# Altium PCB NFC_antenna.PcbDoc
Units mm, origin at the board's own origin, x right, y up, seen from the top; angles counter-clockwise.
Board outline 37.28 x 31.82 mm, 2 copper layers (Top Layer, Bottom Layer), stack 1.671 mm thick; 4 components, 7 nets, 21 pads, 2 vias.
Unrouted connection lines stored in the file: 13.
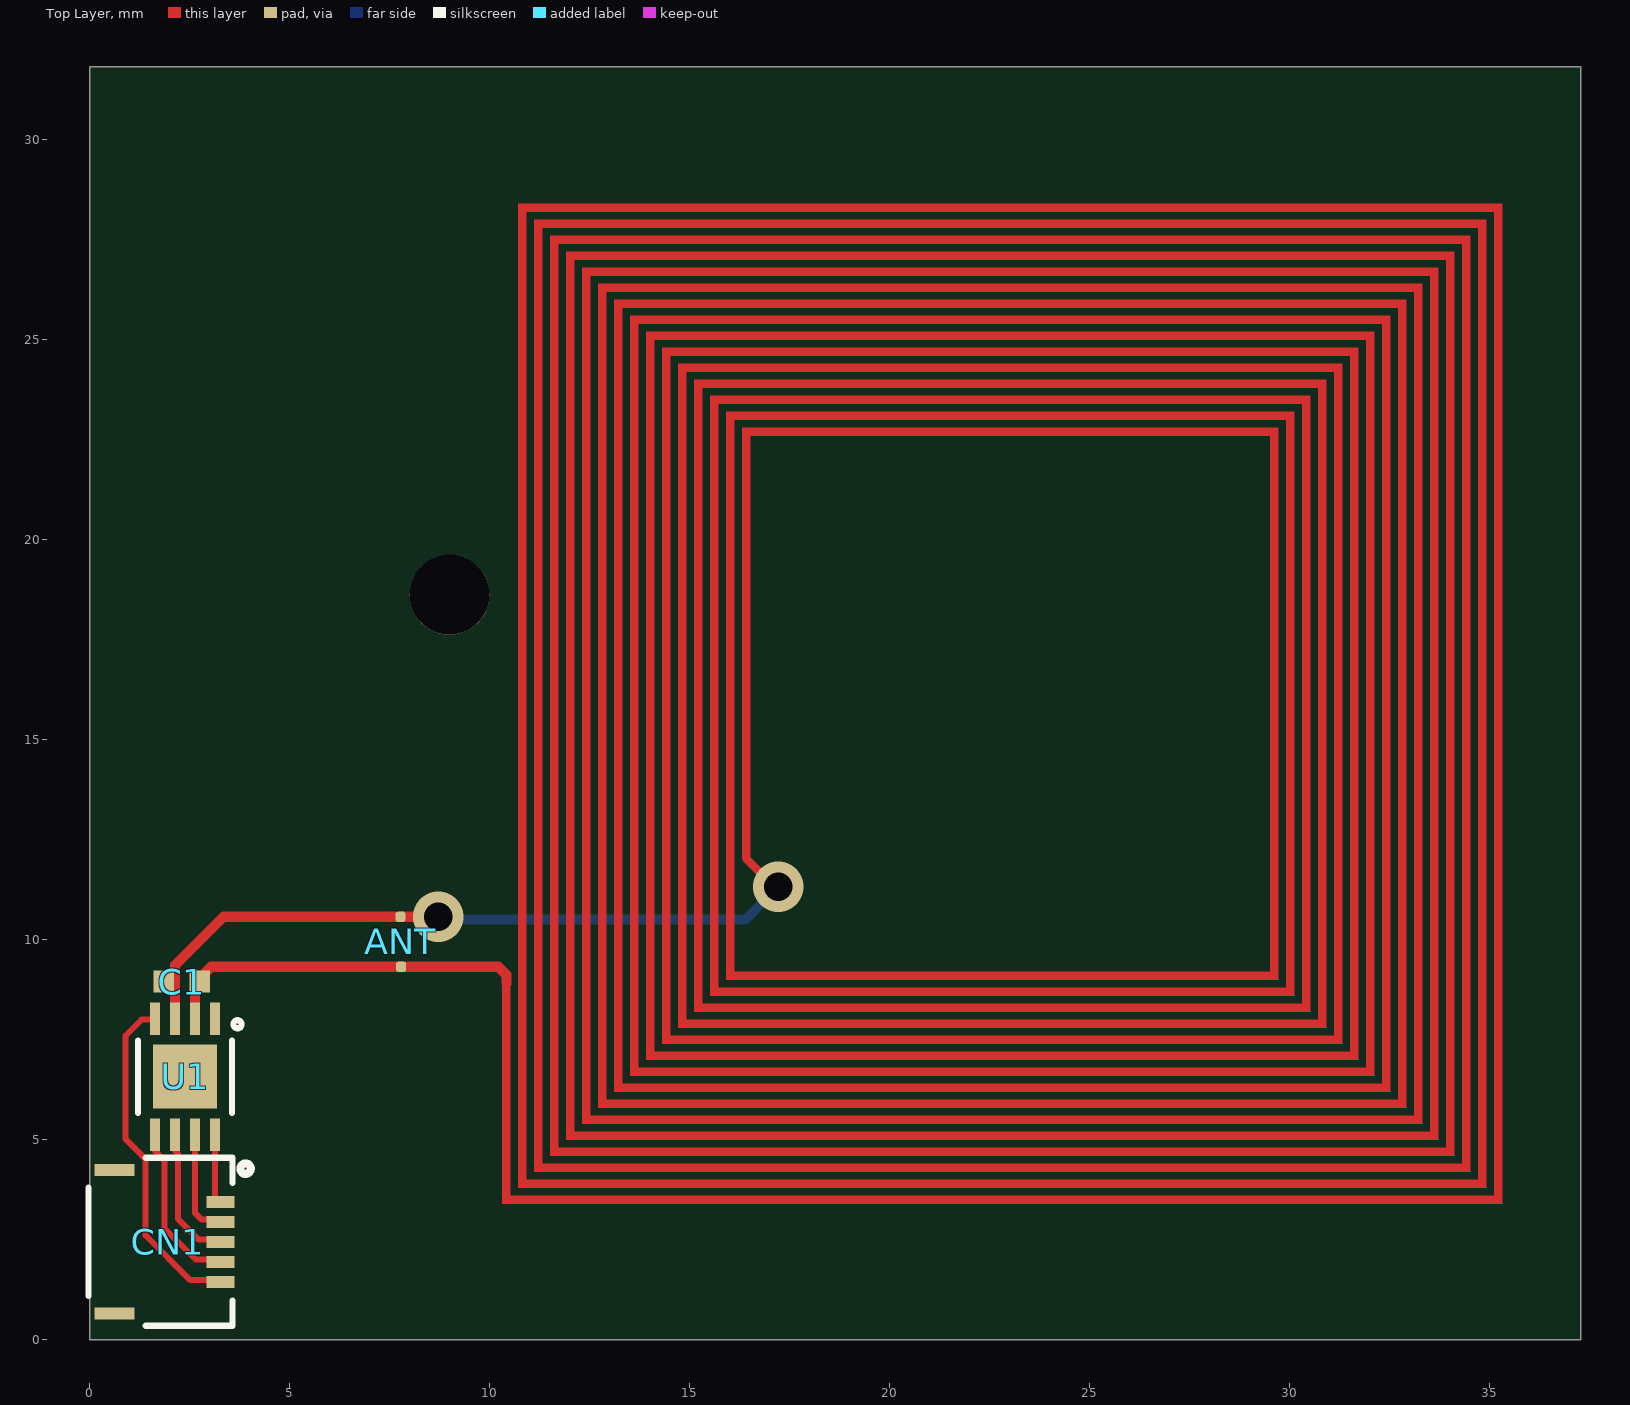
[diagram p0: Top Layer view]
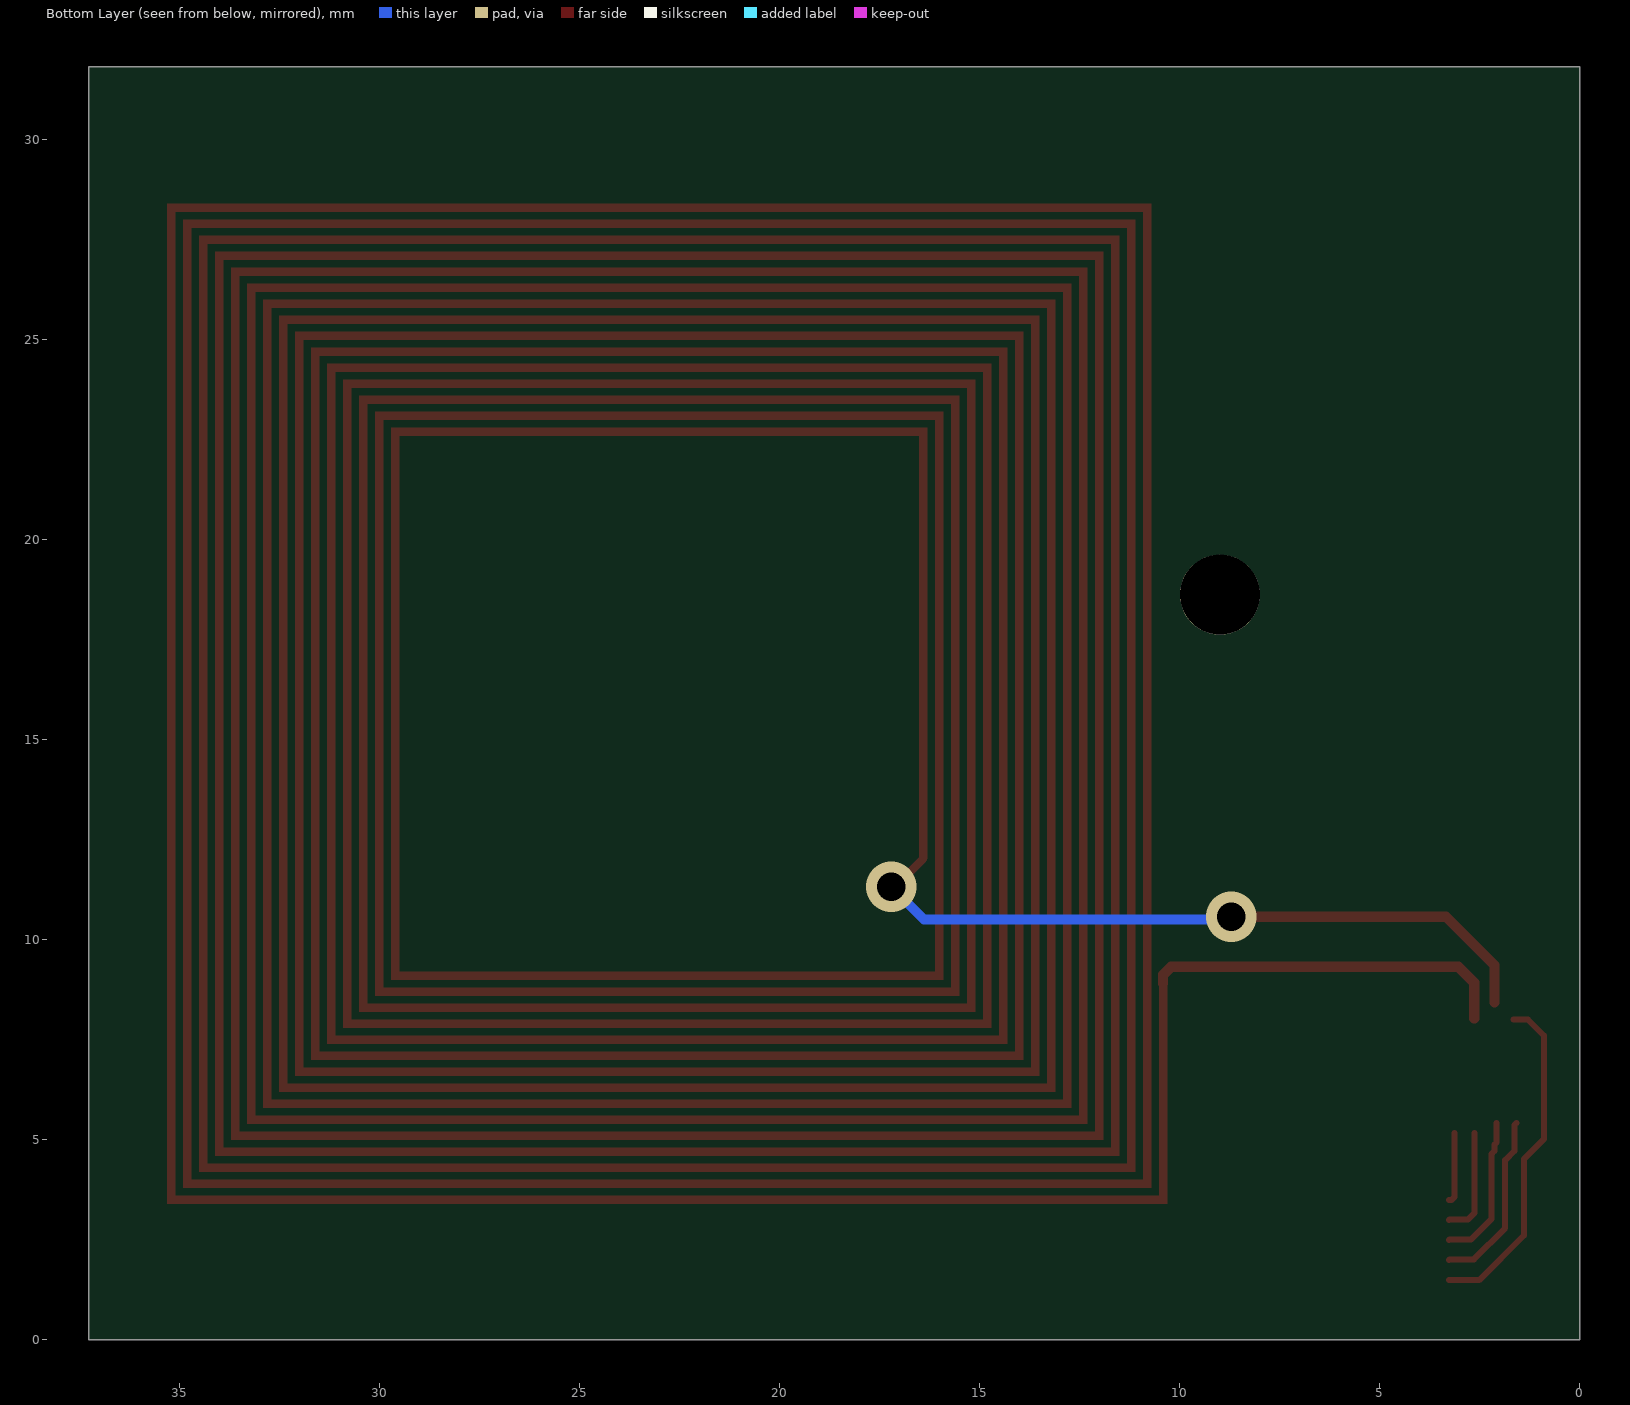
[diagram p1: Bottom Layer view, seen from below]
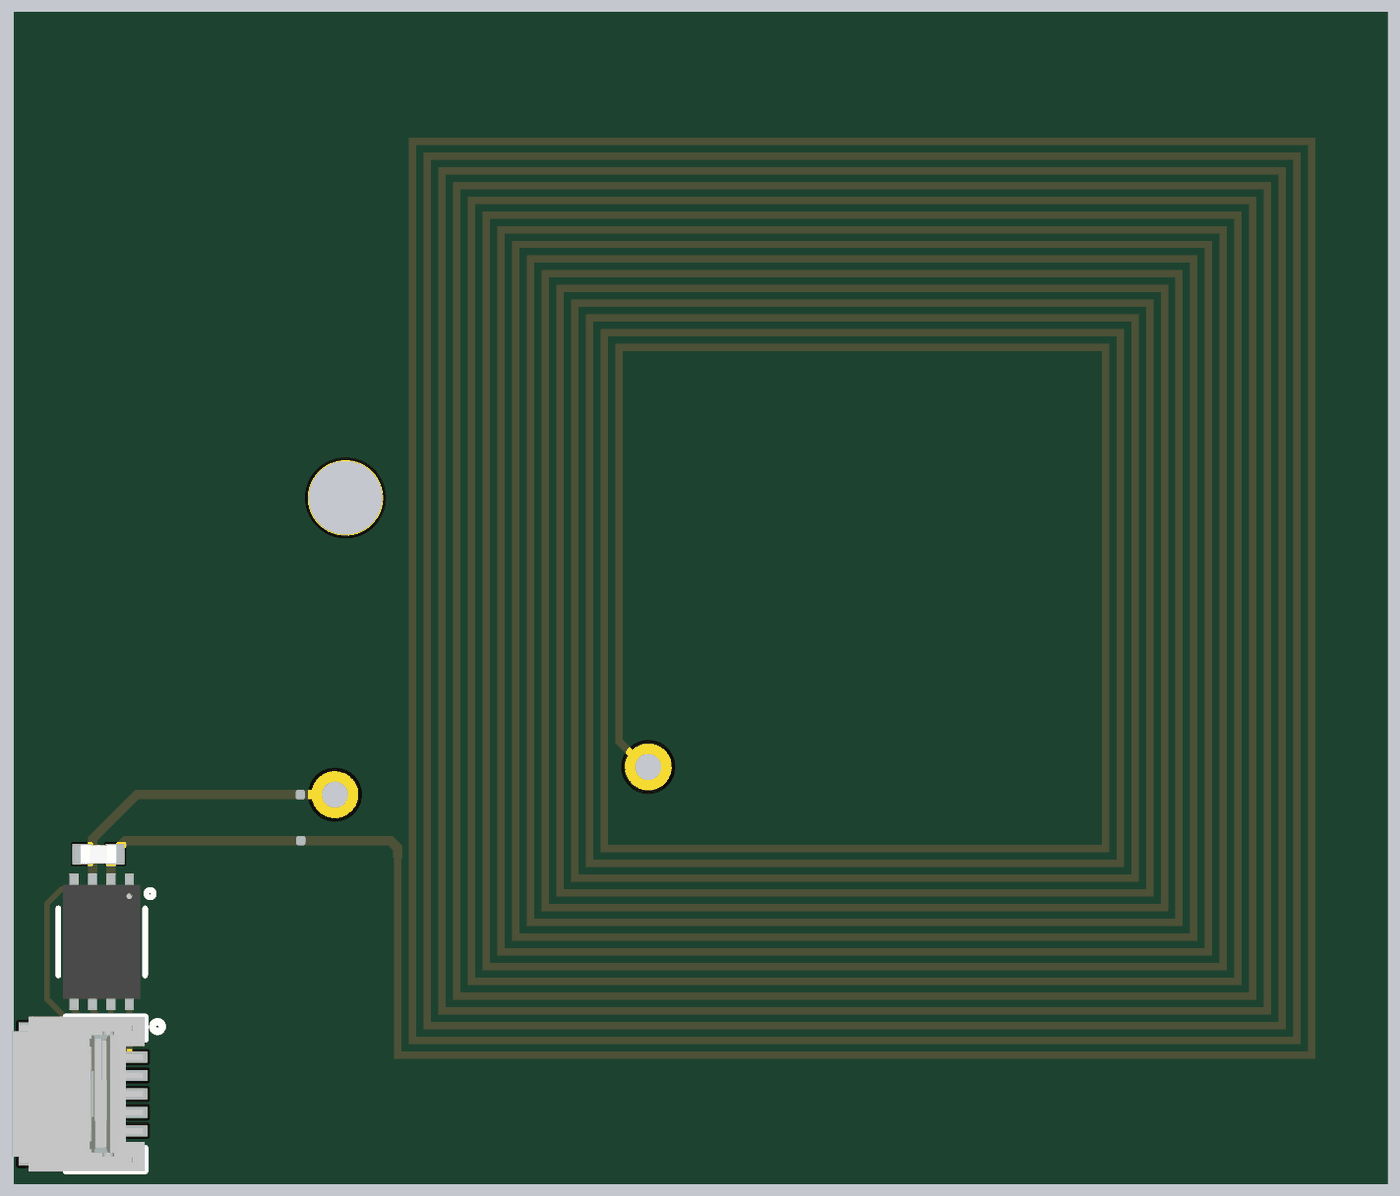
[diagram p2: 3D render of the assembled board from above, using the file's embedded part models]

## Layer stack, top to bottom
Top Solder: solder mask 0.0102, Solder Resist, Dk 3.5
Top Layer: signal copper 0.0356
Dielectric 1: dielectric 1.6, FR-4, Dk 4.5
Bottom Layer: signal copper 0.0356
Bottom Solder: solder mask 0.0102, Solder Resist, Dk 3.5

## Board outline
0,0 37.28,0 37.28,31.82 0,31.82

## Design rules (kind name [scope] priority, off if disabled: settings)
Clearance [All] p1: gap=0.15 ignorepadtopadclearanceinfootprint=FALSE
PolygonConnect [All] p1: connectstyle=Relief reliefconductorwidth=0.254 reliefentries=4 polygonreliefangle="90 Angle" airgapwidth=0.254
RoutingVias [All] p1: holewidth=0.711 width=1.27 viastyle="Through Hole" minholewidth=0.711 minwidth=1.27 maxholewidth=0.711 maxwidth=1.27
SolderMaskExpansion [All] p1: expansion=0.102 istentingtop=FALSE
Width [All] p1: maxlimit=0.3 minlimit=0.15 preferedwidth=0.15
30 further rules are at their usual default settings.

## Components (designator, comment, footprint, x,y, rotation, side; value= is the part's Value field where it differs from the comment)
ANT "ST25D_ANT" ESL_NFC_ANT 7.776,10.567 r0 top
C1 "Capacitor" C0402 2.3,8.95 r0 top
CN1 "5034800540" CON_5034800540_MOL 1.778,2.443 r270 top
U1 "ST25DV04K-IER6C3" UFDFPN8_STM 2.387,6.57 r270 top

## Footprints (in the part's own frame and the unit in brackets; to place one, negate y for a bottom-side part, rotate by r counter-clockwise, add the part's x,y. Pads: shape width x height; smd on the part's side, far side on the other; paste and mask are expansions set on the pad)
C0402 [mm]
  rect 0.51x0.56 smd mask+0.05: 1(-0.45,0) 2(0.45,0)
  body extent -0.5,-0.3 0.5,0.3, height 0.4
CON_5034800540_MOL [mm]
  rect 0.3x0.7 smd paste+0 mask+0.076: 1(-1,1.5) 2(-0.5,1.5) 3(0,1.5) 4(0.5,1.5) 5(1,1.5)
  rect 0.3x1 smd paste+0 mask+0.076: P1(-1.79,-1.15) P2(1.79,-1.15)
  silkscreen extent -2.1,-1.8 2.1,2.25, body extent -2.1,-1.82 2.1,1.78, height 1.87
ESL_NFC_ANT [mil]
  rrect50% 10x10 smd mask+4: 1(0,0) 2(0.51,-49.21)
  Top Layer region: 1084.43,-282.16 100.18,-282.16 100.17,-66.29 100.27,-66.36 104.11,-67.12 107.95,-66.36 108.05,-66.29 108.05,-274.28 1076.55,-274.28 1076.55,694.22 123.8,694.22 123.8,-258.54 1060.81,-258.54 1060.81,678.47 139.55,678.47 139.55,-242.79 1045.06,-242.79 1045.06,662.72 155.29,662.72 155.29,-227.04 1029.31,-227.04 1029.31,646.98 171.04,646.98 171.04,-211.29 1013.56,-211.29 1013.56,631.23 186.79,631.23 186.79,-195.54 997.81,-195.54 997.81,615.48 202.54,615.48 202.54,-179.8 982.07,-179.8 982.07,599.73 218.29,599.73 218.29,-164.05 966.32,-164.05 966.32,583.98 234.03,583.98 234.03,-148.3 950.57,-148.3 950.57,568.24 249.78,568.24 249.78,-132.55 934.82,-132.55 934.82,552.49 265.53,552.49 265.53,-116.8 919.07,-116.8 919.07,536.74 281.28,536.74 281.28,-101.06 903.33,-101.06 903.33,520.99 297.03,520.99 297.03,-85.31 887.58,-85.31 887.58,505.24 312.77,505.24 312.77,-69.56 871.83,-69.56 871.83,489.5 328.52,489.5 328.52,-53.81 856.08,-53.81 856.08,473.75 344.27,473.75 344.27,57 336.4,57 336.4,481.62 863.96,481.62 863.96,-61.69 320.65,-61.69 320.65,497.37 879.7,497.37 879.7,-77.43 304.9,-77.43 304.9,513.12 895.45,513.12 895.45,-93.18 289.15,-93.18 289.15,528.87 911.2,528.87 911.2,-108.93 273.4,-108.93 273.4,544.61 926.95,544.61 926.95,-124.68 257.66,-124.68 257.66,560.36 942.7,560.36 942.7,-140.43 241.91,-140.43 241.91,576.11 958.44,576.11 958.44,-156.17 226.16,-156.17 226.16,591.86 974.19,591.86 974.19,-171.92 210.41,-171.92 210.41,607.61 989.94,607.61 989.94,-187.67 194.66,-187.67 194.66,623.35 1005.69,623.35 1005.69,-203.42 178.92,-203.42 178.92,639.1 1021.44,639.1 1021.44,-219.17 163.17,-219.17 163.17,654.85 1037.18,654.85 1037.18,-234.91 147.42,-234.91 147.42,670.6 1052.93,670.6 1052.93,-250.66 131.67,-250.66 131.67,686.35 1068.68,686.35 1068.68,-266.41 115.92,-266.41 115.92,702.09 1084.43,702.09
  Top Layer lines w7.87: 340.33,57 367.8,29.53
  Top Layer lines w10: 0,0 36.99,0 ; 0.51,-49.21 96.23,-49.21 104.11,-57.09 104.11,-65.43
  Bottom Layer lines w10: 39.62,-2.63 339.48,-2.63 371.64,29.53
UFDFPN8_STM [mil]
  rect 31.7x9.8 smd paste+0 mask+0: 1(-57.15,29.55) 2(-57.15,9.85) 3(-57.15,-9.85) 4(-57.15,-29.55) 5(57.15,-29.55) 6(57.15,-9.85) 7(57.15,9.85) 8(57.15,29.55)
  rect 63x63 smd paste+0 mask+0: 9(0,0)
  silkscreen extent -56,-46 36,56, body extent -61,-41 61,41, height 24

## Part data
C1: library part MCD-00003, "Multilayer Ceramic Capacitor, 1.5 pF, 50 V, ± 0.1pF, C0G (NP0), 0402 [1005 Metric]", Manufacturer=Murata, Manufacturer Part Number=GJM1555C1H1R5BB01D, Supplier Part Number 1=490-8087-1-ND, Category="Ceramic Capacitors", ComponentLink1URL=http://tunmcdsvn.tun.st.com/Component_Documentation_Library/Trunk/Capacitor/YAGEO_NP0_Series, ComponentLink2Description=https://datasheet.ciiva.com/8030/1700191-8030107.pdf?src-supplier=Element14, ComponentLink2URL=https://datasheet.ciiva.com/8030/1700191-8030107.pdf?src-supplier=Element14, ComponentLink3Description=https://datasheet.ciiva.com/29542/partnumbering-e-01-29542725.pdf?src-supplier=Digikey, ComponentLink3URL=https://datasheet.ciiva.com/29542/partnumbering-e-01-29542725.pdf?src-supplier=Digikey, ComponentLink4Description=https://datasheet.ciiva.com/29542/partnumbering-e-01-29542726.pdf?src-supplier=Digikey, ComponentLink4URL=https://datasheet.ciiva.com/29542/partnumbering-e-01-29542726.pdf?src-supplier=Digikey, Material=4241ConductorMaterial, Pricing 1="1=0.17, 10=0.112, 50=0.067, 100=0.0527, 500=0.03896, 1000=0.03225, 2500=0.03002, 5000=0.02746 (USD)", RoHS=Yes, Stock 1=133157, Supplier 1=Digikey
CN1: library part 5034800540_5_circuits, "No Description Available", Mfr_Name="Molex Connector Corporation", Copyright="Copyright (C) 2023 Ultra Librarian. All rights reserved.", Manufacturer_Part_Number=5034800540, RefDes=RefDes, Type=DEV
U1: "No Description Available", Mfr_Name=STMicroelectronics, Copyright="Copyright (C) 2023 Ultra Librarian. All rights reserved.", Manufacturer_Part_Number=ST25DV04K-IER6C3, RefDes=RefDes, Type=DEV

## Free pads (board coordinates)
  round 2 hole 2: 13(9,18.62)

## Via types
v1: diameter 1.27/1.27 (per signal layer), hole 0.711, Top Layer to Bottom Layer, 2 vias

## Nets (pads, with @x,y where several pads share a name; then routed paths per layer and width w, separated by ;. In a path a pad name is that pad's centre, name@x,y a point inside that pad or via, vN(x,y) a via of type N, cw(c..) or ccw(c..) an arc to the next point about the centre after c; other vN are vias at no path point)
AC0: ANT.2 C1.2 U1.2 | length 9.1
  Top Layer w0.254: U1.2 2.639,8.024 2.639,8.917 3.039,9.317 10.22,9.317 10.42,9.117 10.42,8.905
AC1: ANT.1 C1.1 U1.3 | length 10.3
  Top Layer w0.2: 16.42,12.015 17.118,11.317 v1(17.215,11.317)
  Top Layer w0.254: 2.137,8.424 2.137,9.357 3.347,10.567 v1(8.715,10.567)
  Bottom Layer w0.2: v1(8.715,10.567) v1@8.782,10.5
  Bottom Layer w0.254: 16.398,10.5 v1(17.215,11.317)
GND: CN1.5 U1.4 | length 8.5
  Top Layer w0.15: U1.4@1.657,8.001 1.301,8.001 0.9,7.6 0.9,5.009 1.4,4.509 1.4,2.6 2.517,1.483 CN1.5@3.278,1.483
GPO: CN1.2 U1.7 | length 2.7
  Top Layer w0.15: U1.7@2.637,5.168 2.637,3.159 2.792,3.004 3.257,3.004 CN1.2@3.278,2.983
SCL: CN1.3 U1.6 | length 3.7
  Top Layer w0.15: U1.6@2.087,5.414 2.087,4.922 2.136,4.873 2.136,4.716 2.216,4.636 2.216,3.008 2.72,2.504 3.257,2.504 CN1.3@3.278,2.483
SDA: CN1.4 U1.5 | length 4.5
  Top Layer w0.15: U1.5@1.589,5.412 1.636,5.365 1.636,4.716 1.87,4.482 1.87,2.783 2.649,2.004 3.257,2.004 CN1.4@3.278,1.983
VDD: CN1.1 U1.8 | length 1.8
  Top Layer w0.15: U1.8@3.137,5.168 3.137,3.558 3.212,3.483 CN1.1@3.278,3.483
pads on no net: CN1.P1 CN1.P2 U1.1 U1.9

## Silkscreen, mask and mechanical layers (free items; w line width, h text height)
Mechanical 1:
  the board outline again, w0.254
Drill Drawing:
  lines w0.381: -27.265,-23.196 -16.854,-23.196 6.762,-23.196 28.6,-23.196 45.106,-23.196 59.58,-23.196 ; -27.265,-20.148 -16.854,-20.148 6.762,-20.148 28.6,-20.148 45.106,-20.148 59.58,-20.148 ; -27.265,-17.1 -16.854,-17.1 6.762,-17.1 28.6,-17.1 45.106,-17.1 59.58,-17.1 ; -27.265,-14.052 -16.854,-14.052 6.762,-14.052 28.6,-14.052 45.106,-14.052 59.58,-14.052 ; -27.265,-11.004 -16.854,-11.004 6.762,-11.004 28.6,-11.004 45.106,-11.004 59.58,-11.004 ; -27.265,-7.956 -16.854,-7.956 6.762,-7.956 28.6,-7.956 45.106,-7.956 59.58,-7.956 ; -27.265,-4.908 59.58,-4.908 ; -16.854,-1.86 -16.854,-26.244 ; 6.762,-1.86 6.762,-26.244 ; 28.6,-1.86 28.6,-26.244 ; 45.106,-1.86 45.106,-26.244 ; -16.854,-26.244 6.762,-26.244 ; -16.854,-26.244 -27.265,-26.244 -27.265,-1.86 59.58,-1.86 59.58,-26.244 45.106,-26.244 ; 6.762,-26.244 28.6,-26.244 ; 28.6,-26.244 45.106,-26.244
  text "Layer" at -25.487,-4.146 h1.52
  text "Name" at -15.076,-4.146 h1.52
  text "Material" at 8.54,-4.146 h1.52
  text "Thickness" at 30.378,-4.146 h1.52
  text "Constant" at 46.884,-4.146 h1.52
  text "Top Overlay" at -15.076,-7.194 h1.52
  text "Top Solder" at -15.076,-10.242 h1.52
  text "Solder Resist" at 8.54,-10.242 h1.52
  text "0.010mm" at 30.378,-10.242 h1.52
  text "3.5" at 46.884,-10.242 h1.52
  text "1" at -25.487,-13.29 h1.52
  text "Top Layer" at -15.076,-13.29 h1.52
  text "0.036mm" at 30.378,-13.29 h1.52
  text "Dielectric 1" at -15.076,-16.338 h1.52
  text "FR-4" at 8.54,-16.338 h1.52
  text "1.600mm" at 30.378,-16.338 h1.52
  text "4.5" at 46.884,-16.338 h1.52
  text "2" at -25.487,-19.386 h1.52
  text "Bottom Layer" at -15.076,-19.386 h1.52
  text "0.036mm" at 30.378,-19.386 h1.52
  text "Bottom Solder" at -15.076,-22.434 h1.52
  text "Solder Resist" at 8.54,-22.434 h1.52
  text "0.010mm" at 30.378,-22.434 h1.52
  text "3.5" at 46.884,-22.434 h1.52
  text "Bottom Overlay" at -15.076,-25.482 h1.52
  text "Total board thickness:" at -25.487,-28.53 h1.52
  text "1.691mm" at 30.378,-28.53 h1.52

## Dimensions
0,31.82 to 0,0 on Mechanical 13